# EAGLE board untitled (EAGLE 9.6.2)
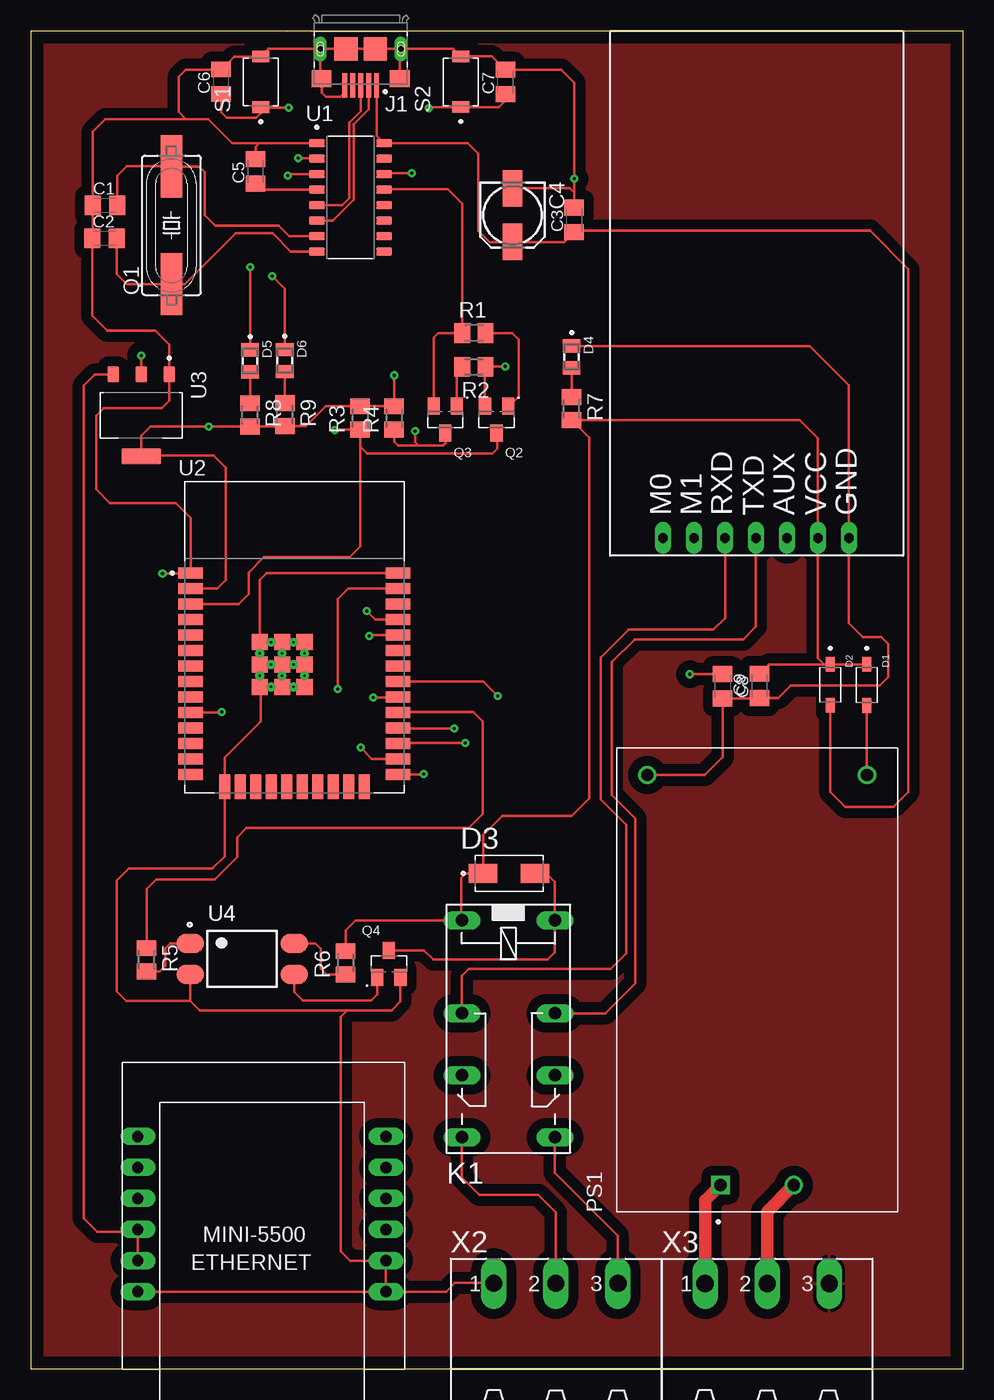
[diagram p0: board, top side]
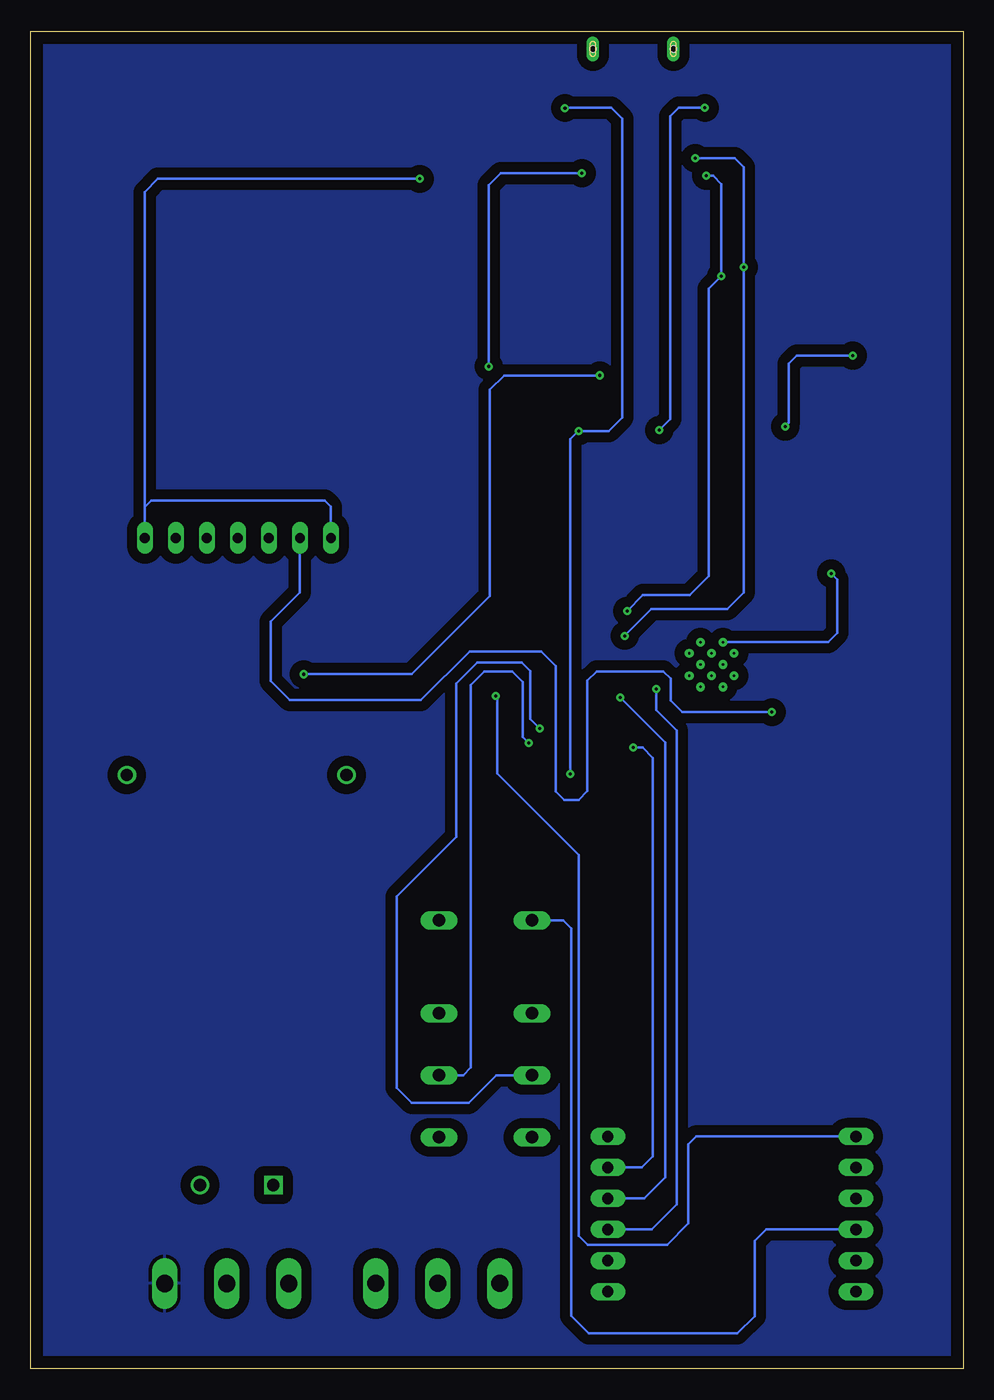
[diagram p1: board, bottom side, seen from below]

Size 76.4 x 109.6 mm. Coordinates in mm from the lower left corner, seen from the top.
Outline: 0,0 76.4,0 76.4,109.6 0,109.6 0,0
Copper layers (1*16): Top 0.035mm / dielectric 1.5mm / Bottom 0.035mm
Design rules "default *": minimum track width 6mil, minimum drill 0.25mm, track to track 6mil, track to pad 6mil, pad to pad 6mil, via to via 6mil, smd to smd 6mil, copper to edge 40mil, drill to drill 6mil, minimum pad ring 10mil, minimum via ring 8mil, stop-mask expansion 4mil, vias tented up to drill 0mil, thermal gap 10mil

## Footprints (pad centres in the part's own frame; a part is rotated, then mirrored left to right if it is on the bottom)
C0805K = smd 1.3 x 1.6: 1 -1,0; 2 1,0
153CLV-0505 = smd 3 x 1.6: + 2.2,0; - -2.2,0
SOD3715X145N = smd 1.21 x 0.73: A 1.68,0; C -1.68,0
DIOM5226X240N = smd 2.33 x 1.55: A 2.135,0; C -2.135,0
LEDC2012X120N = smd 1.1 x 1.45: A 0.9,0; C -0.9,0
EBYTEE220-900T22D = drill 0.8 pad 1.27 long: AUX -4.56,-10.98; GND -4.56,-16.06; M0 -4.56,-0.82; M1 -4.56,-3.36; RXD -4.56,-5.9; TXD -4.56,-8.44; VCC -4.56,-13.52
FCI_10118193-0001LF = smd 0.4 x 2: 1 -1.3,2.975; 2 -0.65,2.975; 3 0,2.975; 4 0.65,2.975; 5 1.3,2.975 | smd 1.6 x 1.4: S1 -3.2,2.45; S2 3.2,2.45 | smd 1.9 x 1.9: S3 1.2,0; S4 -1.2,0 | drill 0.5 pad 0.9 long: S5 -3.3,0; S6 3.3,0 | hole 0.5: -3.3,0; 3.3,0
351 = drill 1.016 long: 1 -3.81,-3.81; 16 -3.81,3.81; O1 8.89,-3.81; O2 8.89,3.81; P1 3.81,-3.81; P2 3.81,3.81; S1 13.97,-3.81; S2 13.97,3.81
CONV_HLK-5M05 = drill 1 pad 1.5 square: 1 -16.8,3 | drill 1 pad 1.5: 2 -16.8,-3; 3 16.8,9; 4 16.8,-9
SM49 = smd 5.08 x 1.778: 1 -4.826,0; 2 4.826,0
SOT95P240X120-3N = smd 1 x 1.4: 1 -0.95,-1.1; 2 0.95,-1.1; 3 0,1.1
M0805 = smd 1.3 x 1.6: 1 -0.95,0; 2 0.95,0
SW_TL1015AF160QG = smd 0.95 x 1.4: 1 -2.075,0; 2 2.075,0
SOIC127P600X180-16N = smd 1.31 x 0.62: 1 -2.75,4.445; 2 -2.75,3.175; 3 -2.75,1.905; 4 -2.75,0.635; 5 -2.75,-0.635; 6 -2.75,-1.905; 7 -2.75,-3.175; 8 -2.75,-4.445; 9 2.75,-4.445; 10 2.75,-3.175; 11 2.75,-1.905; 12 2.75,-0.635; 13 2.75,0.635; 14 2.75,1.905; 15 2.75,3.175; 16 2.75,4.445
MODULE_ESP32-WROOM-32D = smd 2 x 0.9: 1 -8.5,5.26; 2 -8.5,3.99; 3 -8.5,2.72; 4 -8.5,1.45; 5 -8.5,0.18; 6 -8.5,-1.09; 7 -8.5,-2.36; 8 -8.5,-3.63; 9 -8.5,-4.9; 10 -8.5,-6.17; 11 -8.5,-7.44; 12 -8.5,-8.71; 13 -8.5,-9.98; 14 -8.5,-11.25; 25 8.5,-11.25; 26 8.5,-9.98; 27 8.5,-8.71; 28 8.5,-7.44; 29 8.5,-6.17; 30 8.5,-4.9; 31 8.5,-3.63; 32 8.5,-2.36; 33 8.5,-1.09; 34 8.5,0.18; 35 8.5,1.45; 36 8.5,2.72; 37 8.5,3.99; 38 8.5,5.26 | smd 0.9 x 2: 15 -5.715,-12.25; 16 -4.445,-12.25; 17 -3.175,-12.25; 18 -1.905,-12.25; 19 -0.635,-12.25; 20 0.635,-12.25; 21 1.905,-12.25; 22 3.175,-12.25; 23 4.445,-12.25; 24 5.715,-12.25 | smd 1.33 x 1.33: 39_1 -2.835,-0.405; 39_2 -1,-0.405; 39_3 0.835,-0.405; 39_4 -2.835,-2.24; 39_5 -1,-2.24; 39_6 0.835,-2.24; 39_7 -2.835,-4.075; 39_8 -1,-4.075; 39_9 0.835,-4.075 | drill 0.2 pad 0.3: 39_10 -1.917,-0.405; 39_11 -0.083,-0.405; 39_12 -2.835,-1.323; 39_13 -1,-1.323; 39_14 0.835,-1.323; 39_15 -1.917,-2.24; 39_16 -0.083,-2.24; 39_17 -2.835,-3.158; 39_18 -1,-3.158; 39_19 0.835,-3.158; 39_20 -1.917,-4.075; 39_21 -0.083,-4.075
SOT229P700X180-4N = smd 1.31 x 0.93: 1 -3.345,2.29; 2 -3.345,0; 3 -3.345,-2.29 | smd 1.31 x 3.24: 4 3.345,0
SOT254P975X400-4N = smd 2.25 x 1.6: 1 -4.25,1.27; 2 -4.25,-1.27; 3 4.25,-1.27; 4 4.25,1.27
MINI_W5500 = drill 0.914 long: 3V3 21.844,-8.89; 3V3.2 21.844,-11.43; CS 1.524,-16.51; GND 1.524,-6.35; GND.2 1.524,-8.89; GND.3 21.844,-6.35; INT 1.524,-19.05; MISO 21.844,-19.05; MOSI 1.524,-11.43; NC 21.844,-13.97; RST 21.844,-16.51; SCLK 1.524,-13.97
MSTBA3 = drill 1.397 long: 1 -5.08,5.08; 2 0,5.08; 3 5.08,5.08

## Placement (x,y rotation side)
C1  [C0805K]  6.1,95.33 0 top
C2  [C0805K]  6.06,92.63 0 top
C3  [C0805K]  44.53,94.16 90 top
C4  [153CLV-0505]  39.48,94.53 270 top
C5  [C0805K]  18.43,98.13 90 top
C6  [C0805K]  15.6,105.47 90 top
C7  [C0805K]  38.89,105.44 90 top
C8  [C0805K]  59.7,55.97 90 top
C9  [C0805K]  56.7,55.95 270 top
D1  1N5819HW-7  [SOD3715X145N]  68.5,56.05 270 top
D2  1N5819HW-7  [SOD3715X145N]  65.51,56.06 270 top
D3  US1M-13  [DIOM5226X240N]  39.2,40.6 0 top
D4  SML-LXT0805IW-TR  [LEDC2012X120N]  44.32,82.92 270 top
D5  SML-LXT0805IW-TR  [LEDC2012X120N]  17.99,82.59 270 top
D6  SML-LXT0805IW-TR  [LEDC2012X120N]  20.82,82.62 270 top
EBYTEE220-900T22D1  [EBYTEE220-900T22D]  50.98,72.65 90 top
J1  10118193-0001LF  [FCI_10118193-0001LF]  27.04,108.16 180 top
K1  351  [351]  39.14,32.95 270 top
PS1  HLK-5M05  [CONV_HLK-5M05]  59.51,31.87 90 top
Q1  [SM49]  11.55,93.7 90 top
Q2  MMBT3904  [SOT95P240X120-3N]  38.17,77.79 180 top
Q3  MMBT3904  [SOT95P240X120-3N]  33.97,77.79 180 top
Q4  S9013  [SOT95P240X120-3N]  29.35,33.2 0 top
R1  [M0805]  36.32,84.87 0 top
R2  [M0805]  36.32,82.13 180 top
R3  [M0805]  27,77.93 90 top
R4  [M0805]  29.78,77.92 90 top
R5  [M0805]  9.51,33.53 270 top
R6  [M0805]  25.8,33.28 90 top
R7  [M0805]  44.33,78.69 270 top
R8  [M0805]  17.98,78.17 270 top
R9  [M0805]  20.84,78.2 270 top
S1  TL1015AF160QG  [SW_TL1015AF160QG]  18.86,105.46 90 top
S2  TL1015AF160QG  [SW_TL1015AF160QG]  35.24,105.47 90 top
U1  CH340G  [SOIC127P600X180-16N]  26.21,96 0 top
U2  ESP32-WROOM-32D  [MODULE_ESP32-WROOM-32D]  21.61,59.96 0 top
U3  AMS1117  [SOT229P700X180-4N]  9.07,78.14 270 top
U4  PC817X2NIP0F  [SOT254P975X400-4N]  17.34,33.61 0 top
U$1  MINI_W5500  [MINI_W5500]  30.64,-0.01 180 top
X2  MSTBA3  [MSTBA3]  43.04,1.93 0 top
X3  MSTBA3  [MSTBA3]  60.33,1.92 0 top

## Library data of the parts
C1-C9 = rcl; SPICEPREFIX: C
D1 D2 = 1N5819HW-7; AVAILABILITY: In Stock; DESCRIPTION: Diode Schottky 40 V 1A Surface Mount SOD-123; MF: Diodes Inc.; MP: 1N5819HW-7; PACKAGE: SOD-123 Fairchild Semiconductor; PRICE: None; PURCHASE-URL: https://pricing.snapeda.com/search/part/1N5819HW-7/?ref=eda
D3 = US1M-13; AVAILABILITY: In Stock; DESCRIPTION: Diode Standard 1000 V 1A Surface Mount SMA; MF: Diodes Incorporated; MP: US1M-13; PACKAGE: DO-214AC-214 Diodes Incorporated; PRICE: None; PURCHASE-URL: https://pricing.snapeda.com/search/part/US1M-13/?ref=eda
D4-D6 = SML-LXT0805IW-TR; AVAILABILITY: In Stock; DESCRIPTION: Red - LED Indication - Discrete 2V 0805 (2012 Metric); MF: Lumex Opto/Components; MP: SML-LXT0805IW-TR; PACKAGE: 0805 Lumex; PRICE: None; PURCHASE-URL: https://pricing.snapeda.com/search/part/SML-LXT0805IW-TR/?ref=eda
EBYTEE220-900T22D1 = EByte E220-900T22D
J1 = 10118193-0001LF; AVAILABILITY: In Stock; DESCRIPTION: USB - micro B USB 2.0 Receptacle Connector 5 Position Surface Mount, Right Angle; Through Hole; MF: FCI; MP: 10118193-0001LF; PACKAGE: None; PRICE: None; PURCHASE-URL: https://pricing.snapeda.com/search/part/10118193-0001LF/?ref=eda
K1 = relay; OC_FARNELL: unknown; OC_NEWARK: unknown
PS1 = HLK-5M05; AVAILABILITY: Not in stock; MF: Hi-link; MP: HLK-5M05; PACKAGE: Package; PRICE: None
Q1 = crystal; OC_FARNELL: unknown; OC_NEWARK: unknown
Q2 Q3 = MMBT3904; AVAILABILITY: In Stock; DESCRIPTION: Bipolar (BJT) Transistor NPN 40 V 200 mA 300MHz 300 mW Surface Mount SOT-23-3 (TO-236); MF: ON Semiconductor; MP: MMBT3904; PACKAGE: SOT-23-3 Motorola; PRICE: None
Q4 = S9013; AVAILABILITY: In Stock; DESCRIPTION: Bipolar (BJT) Transistor NPN 20V 500mA 625mW Through Hole TO-92-3; MF: JCET; MP: S9013; PACKAGE: SOT-23-3 JCET; PRICE: None; PURCHASE-URL: https://pricing.snapeda.com/search/part/S9013/?ref=eda
R1-R9 = rcl; SPICEPREFIX: R
S1 S2 = TL1015AF160QG; AVAILABILITY: In Stock; DESCRIPTION: Tactile Switch SPST-NO Top Actuated Surface Mount; MF: E-Switch; MP: TL1015AF160QG; PACKAGE: None; PRICE: None; PURCHASE-URL: https://pricing.snapeda.com/search/part/TL1015AF160QG/?ref=eda
U1 = CH340G; AVAILABILITY: Not in stock; DESCRIPTION: USB Interface Integrated Circuit; MF: WCH; MP: Ch340G; PACKAGE: None; PRICE: None
U2 = ESP32-WROOM-32D; AVAILABILITY: In Stock; DESCRIPTION: Bluetooth, WiFi 802.11b/g/n, Bluetooth v4.2 +EDR, Class 1, 2 and 3 Transceiver Module 2.4GHz ~ 2.5GHz Integrated; MF: Espressif Systems; MP: ESP32-WROOM-32D; PACKAGE: Module Espressif Systems; PRICE: None; PURCHASE-URL: https://pricing.snapeda.com/search/part/ESP32-WROOM-32D/?ref=eda
U3 = AMS1117; AVAILABILITY: Not in stock; DESCRIPTION: 1A LOW DROPOUT VOLTAGE REGULATOR SOT-223; MF: Advanced Monolithic Systems; MP: AMS1117; PACKAGE: SOT-223 Seeed Technology; PRICE: None
U4 = PC817X2NIP0F; AVAILABILITY: Not in stock; DESCRIPTION: Optoisolator Transistor Output 5000Vrms 1 Channel 4-SMD; MF: Sharp Microelectronics; MP: PC817X2NIP0F; PACKAGE: SMD-4 Sharp Microelectronics; PRICE: None
U$1 = ethernet-mikroavr
X2 X3 = con-phoenix-508; MF: FARNELL; MPN: 1757255; OC_FARNELL: 3705183; OC_NEWARK: 71C4162

## Nets
CONFIG_LORA: R5.1 U2.29
CS_LAN: U2.26 U$1.CS
DTR: Q3.2 R1.1 U1.13
EN: C6.1 Q2.3 R3.1 S1.1 U2.3
GND: C1.1 C2.1 C3.2 C4.- C5.2 C6.2 C7.2 C8.1 C9.2 D4.C EBYTEE220-900T22D1.GND EBYTEE220-900T22D1.M0 J1.5 J1.S1 J1.S2 J1.S3 J1.S4 J1.S5 J1.S6 PS1.3 Q4.2 S1.2 S2.2 U1.1 U2.1 U2.15 U2.38 U2.39_1 U2.39_2 U2.39_3 U2.39_4 U2.39_5 U2.39_6 U2.39_7 U2.39_8 U2.39_9 U2.39_10 U2.39_11 U2.39_12 U2.39_13 U2.39_14 U2.39_15 U2.39_16 U2.39_17 U2.39_18 U2.39_19 U2.39_20 U2.39_21 U3.1 U4.2 U$1.GND U$1.GND.2 U$1.GND.3 X2.1
IO0: C7.1 Q3.3 R4.1 S2.1 U2.25
M1: EBYTEE220-900T22D1.M1 U2.10
MISO_VSPI: U2.31 U$1.MISO
MOSI_VSPI: U2.37 U$1.MOSI
N: X3.3
N$1: D1.A PS1.4
N$2: C5.1 U1.4
N$3: Q2.1 R1.2
N$4: Q3.1 R2.2
N$5: R5.2 U4.1
N$6: D4.A R7.1
N$7: R6.1 U4.4
N$8: D3.A K1.16 Q4.3
N$9: C1.2 Q1.2 U1.7
N$10: C2.2 Q1.1 U1.8
N$11: D5.A R8.1
N$12: Q4.1 U4.3
N$13: PS1.1 X3.1
N$14: PS1.2 X3.2
N$15: D6.A R9.1
OUT+: C8.2 D1.C D2.C D3.C EBYTEE220-900T22D1.VCC K1.1 R6.2 R7.2 U3.3 U$1.3V3 U$1.3V3.2
RTS: Q2.2 R2.1 U1.14
RX: D6.C U1.3 U2.35
RX_LORA: EBYTEE220-900T22D1.RXD K1.P1
RXLORA_CONFIG: K1.S1 X2.2
RXLORA_MICRO: K1.O1 U2.28
SCK_VSPI: U2.30 U$1.SCLK
TX: D5.C U1.2 U2.34
TX_LORA: EBYTEE220-900T22D1.TXD K1.P2
TXLORA_CONFIG: K1.S2 X2.3
TXLORA_MICRO: K1.O2 U2.27
USB_N: J1.2 U1.6
USB_P: J1.3 U1.5
VCC: C9.1 R3.2 R4.2 R8.2 R9.2 U2.2 U3.2 U3.4
VUSB: C3.1 C4.+ D2.A J1.1 U1.16

## Tracks (layer width: path | path; a pad name or v marks a point on that pad's centre or on a via)
CONFIG_LORA
  Top 0.203: R5.1 9.51,39.33 10.31,40.13 15.08,40.13 16.92,41.96 16.92,43.56 17.68,44.32 35.89,44.32 37.04,45.47 37.04,53.04 36.26,53.82 30.14,53.82 U2.29
CS_LAN  (via drill 0.25)
  Top 0.203: v27.03,50.92 27.97,49.98 U2.26
  Bottom 0.203: U$1.CS 26.34,16.5 25.43,17.42 25.43,50.08 26.26,50.92 v27.03,50.92
DTR
  Top 0.203: Q3.2 33.02,84.51 33.4,84.89 35.35,84.89 R1.1 35.37,95.48 34.16,96.69 29.01,96.69 U1.13
EN  (via drill 0.25)
  Top 0.203: 27,75.76 R3.1 24.96,76.98 v24.9,76.92 | 27,75.76 27,75.56 27.57,74.99 37.8,74.99 38.24,75.43 38.24,76.62 Q2.3 | C6.1 15.6,102.97 16.06,102.51 18.48,102.51 18.88,102.91 18.88,103.37 | 18.88,103.37 S1.1 | U2.3 17.05,62.68 17.88,63.51 17.88,65.27 19.12,66.51 26.16,66.51 27.02,67.37 27.02,75.74 27,75.76 | v21.16,103.33 18.92,103.33 18.88,103.37
  Bottom 0.203: v24.9,76.92 24,77.82 24,102.64 23.29,103.34 21.18,103.34 v21.16,103.33
GND  (via drill 0.25)
  Top 0.203: J1.S6 23.74,105.81 J1.S2 23.84,104.57 24.18,104.23 25.37,104.23 25.77,104.64 25.77,105.15 J1.5 | J1.S6 J1.S3 J1.S4 J1.S5 | J1.S5 30.24,108.06 J1.S1 | J1.S5 34.63,108.16 S2.2 35.27,107.57 37.76,107.57 C7.2 43.48,106.45 44.53,105.39 v44.53,97.51 44.53,96.39 | C4.- 44.18,96.73 44.53,96.39 | C3.2 44.53,96.39 | U1.1 18.72,100.44 | C5.2 18.43,100.15 18.72,100.44 | 18.8,59.55 U2.39_10 U2.39_2 | 18.8,59.55 U2.39_1 18.78,64.65 19.35,65.22 U2.38 | U2.39_2 U2.39_11 U2.39_3 U2.39_14 U2.39_6 | U2.39_6 U2.39_19 U2.39_9 U2.39_21 U2.39_8 | U2.39_2 U2.39_13 U2.39_5 | U2.39_5 20.58,57.72 | 18.8,59.55 18.78,59.54 U2.39_12 U2.39_4 | U2.39_4 U2.39_15 20.58,57.72 | U2.39_5 U2.39_16 U2.39_6 | U2.39_4 U2.39_17 U2.39_7 18.86,55.88 | 20.58,57.72 20.58,56.83 U2.39_18 U2.39_8 | U2.39_8 U2.39_20 18.86,55.88 | U$1.GND 34.05,6.34 34.75,7.05 37.91,7.05 X2.1 | U$1.GND U$1.GND.2 26.18,8.88 25.41,9.66 25.41,28.85 25.96,29.39 | U$1.GND U$1.GND.3 | Q4.2 30.3,30.1 29.59,29.39 25.96,29.39 | 25.96,29.39 13.87,29.39 13.09,30.17 | U4.2 13.09,30.17 | PS1.3 55.24,48.67 56.7,50.13 C9.2 59.68,54.95 C8.1 61.26,54.97 62.28,55.99 69.56,55.99 70.26,56.68 70.26,59.4 69.66,59.99 68.16,59.99 67.04,61.11 EBYTEE220-900T22D1.GND 67.04,80.61 63.83,83.82 D4.C | J1.S6 19.48,108.16 S1.2 16.67,107.54 C6.2 12.72,106.47 12.14,105.9 12.14,103.01 12.73,102.42 | 12.73,102.42 6.14,102.42 5.1,101.38 C1.1 5.1,92.67 C2.1 5.06,86.3 6.27,85.09 10.2,85.09 11.36,83.93 U3.1 11.36,79.34 10.76,78.74 5.99,78.74 5.38,78.13 5.38,72.09 6.5,70.97 11.88,70.97 13.11,69.74 U2.1 12.9,65.01 12.57,65.01 12.41,65.17 v10.81,65.17 | 12.73,102.42 14.54,102.42 16.52,100.44 18.72,100.44
  Top 0.203: 18.86,55.88 18.86,53.06 15.9,50.09 U2.15 15.9,42 14.9,41.01 8.05,41.01 7.07,40.02 7.07,30.94 7.83,30.17 13.09,30.17
  Bottom 0.203: EBYTEE220-900T22D1.M0 51.8,70.66 52.29,71.16 66.5,71.16 67.04,70.62 EBYTEE220-900T22D1.GND 67.04,96.43 65.96,97.51 v44.53,97.51 44.52,97.51 | U2.39_10 11.08,59.55 10.34,60.29 10.34,64.7 v10.81,65.17
IO0  (via drill 0.25)
  Top 0.203: C7.1 38.89,103.92 38.36,103.39 S2.1 32.7,103.39 v32.62,103.32 | R4.1 29.78,75.98 30.13,75.64 31.78,75.64 | 31.78,75.64 33.77,75.64 34.01,75.88 34.01,76.65 Q3.3 | U2.25 32.18,48.71 v32.21,48.74 | v31.49,76.85 31.49,75.93 31.78,75.64
  Bottom 0.203: v32.21,48.74 32.21,76.18 31.54,76.85 v31.49,76.85 29.02,76.85 27.92,77.95 27.92,102.44 28.84,103.36 32.62,103.36 v32.62,103.32
M1  (via drill 0.25)
  Top 0.203: U2.10 15.65,53.79 v15.67,53.82
  Bottom 0.203: v15.67,53.82 23.03,53.82 23.98,54.76 23.98,56.56 24.58,57.16 30.03,57.16 30.78,56.4 30.78,47.35 31.51,46.63 32.67,46.63 33.37,47.32 33.37,57.6 34.57,58.8 40.42,58.8 44.42,54.8 55.15,54.8 56.73,56.38 56.73,61.23 54.34,63.63 EBYTEE220-900T22D1.M1
MISO_VSPI  (via drill 0.25)
  Top 0.203: v38.28,55.15 37.09,56.33 U2.31
  Bottom 0.203: U$1.MISO 21.88,19.04 22.51,18.41 22.51,11.92 24.27,10.17 30.74,10.17 31.51,10.93 31.51,42.11 38.19,48.79 38.19,55.06 v38.28,55.15
MOSI_VSPI  (via drill 0.25)
  Top 0.203: v25.15,55.71 25.15,63.08 26.02,63.95 U2.37
  Bottom 0.203: U$1.MOSI 25.52,11.42 23.47,13.47 23.47,52.3 25.15,53.99 v25.15,55.71
N
  pour Bottom (isolate 0.813): -0.58,110.21 76.42,110.21 76.42,-0.79 -0.58,-0.79
  pour Top (isolate 0.813): -0.58,110.21 76.42,110.21 76.42,-0.79 -0.58,-0.79
N$1
  Top 0.203: D1.A 68.5,48.69 PS1.4
N$2
  Top 0.203: U1.4 18.93,96.63 C5.1
N$3
  Top 0.203: Q2.1 39.2,78.89 39.98,79.67 39.98,84.36 39.46,84.87 R1.2
N$4
  Top 0.203: Q3.1 34.92,81.68 R2.2
N$5
  Top 0.203: R5.2 10.59,32.58 11.05,33.03 11.05,34.46 11.46,34.88 U4.1
N$6
  Top 0.203: R7.1 D4.A
N$7
  Top 0.203: R6.1 24.24,32.33 23.77,32.8 23.77,34.44 23.33,34.88 U4.4
N$8
  Top 0.203: D3.A 42.25,40.6 42.96,39.89 K1.16 42.96,34.14 42.36,33.55 32.98,33.55 32.22,34.3 Q4.3
N$9
  Top 0.203: C1.2 7.1,97.78 7.89,98.57 11.51,98.57 Q1.2 13.77,98.53 14.26,98.05 14.26,94.54 15.13,93.66 20.34,93.66 21.18,92.82 U1.7
N$10
  Top 0.203: C2.2 7.06,89.72 7.9,88.88 Q1.1 12.62,88.88 16.79,93.05 19.83,93.05 21.33,91.55 U1.8
N$11
  Top 0.203: D5.A R8.1
N$12
  Top 0.203: U4.3 21.59,30.91 22.3,30.19 27.91,30.19 28.4,30.69 Q4.1
N$13
  Top 1.016: X3.1 55.25,13.8 PS1.1
N$14
  Top 1.016: X3.2 60.33,12.88 PS1.2
N$15
  Top 0.203: D6.A 20.84,81.71 R9.1
OUT+
  Top 0.203: D2.C D1.C | C8.2 60.47,57.74 D2.C | R6.2 25.8,35.92 26.65,36.76 K1.1 35.29,36.81 35.29,40.24 35.65,40.6 D3.C 37.07,43.74 38.65,45.32 44.32,45.32 45.75,46.75 45.75,76.31 R7.2 63.02,77.74 64.5,76.26 EBYTEE220-900T22D1.VCC | U$1.3V3 U$1.3V3.2 8.6,11.23 5.45,11.23 4.35,12.33 4.35,80.56 5.27,81.48 U3.3 | D2.C 65.02,57.74 64.5,58.26 EBYTEE220-900T22D1.VCC | EBYTEE220-900T22D1.VCC
  Bottom 0.203: K1.1 32.77,36.76 32.11,36.1 32.11,4.36 30.66,2.91 18.5,2.91 17.09,4.32 17.09,10.49 16.16,11.42 U$1.3V3.2
RTS  (via drill 0.25)
  Top 0.203: Q2.2 37.22,82.08 R2.1 38.86,82.13 v38.88,82.15 | v31.23,97.99 29.05,97.99 U1.14
  Bottom 0.203: v38.88,82.15 38.88,96.99 37.88,97.99 v31.23,97.99
RX  (via drill 0.25)
  Top 0.203: D6.C 20.82,88.53 v19.81,89.54 | v21.05,97.77 21.18,97.9 U1.3 | v27.54,62.12 28.25,61.41 U2.35
  Bottom 0.203: v21.05,97.77 20.49,97.77 19.81,97.09 v19.81,89.54 20.84,88.52 20.84,64.97 22.39,63.42 26.24,63.42 v27.54,62.12
RX_LORA
  Top 0.203: K1.P1 35.34,32.2 35.91,32.77 47.51,32.77 48.78,34.05 48.78,44.59 46.72,46.65 46.72,58.28 49.01,60.57 55.91,60.57 56.88,61.54 EBYTEE220-900T22D1.RXD
RXLORA_CONFIG
  Top 0.203: X2.2 43.04,12.83 41.58,14.29 36.76,14.29 35.34,15.71 K1.S1
RXLORA_MICRO  (via drill 0.25)
  Top 0.203: v34.7,52.5 30.13,52.5 U2.28
  Bottom 0.203: K1.O1 38.25,24.06 40.5,21.81 45.17,21.81 46.39,23.03 46.39,38.72 41.51,43.6 41.51,56.18 39.8,57.89 36.15,57.89 35.46,57.2 35.46,53.26 v34.7,52.5
SCK_VSPI  (via drill 0.25)
  Top 0.203: v28.08,55.03 30.09,55.03 U2.30
  Bottom 0.203: U$1.SCLK 26.11,13.96 24.39,15.69 24.39,51.34 v28.08,55.03
TX  (via drill 0.25)
  Top 0.203: D5.C v17.99,90.28 17.97,90.3 | v21.95,99.2 23.42,99.2 U1.2 | v27.74,60.07 27.81,60.14 U2.34
  Bottom 0.203: v21.95,99.2 18.73,99.2 17.99,98.46 v17.99,90.28 17.99,63.61 19.31,62.28 25.55,62.28 27.74,60.09 v27.74,60.07
TX_LORA
  Top 0.203: K1.P2 47.08,29.14 49.52,31.58 49.52,45.12 47.61,47.02 47.61,57.92 49.47,59.78 58.37,59.78 59.42,60.83 EBYTEE220-900T22D1.TXD
TXLORA_CONFIG
  Top 0.203: X2.3 48.12,10.9 42.96,16.06 K1.S2
TXLORA_MICRO  (via drill 0.25)
  Top 0.203: v35.59,51.3 30.17,51.3 U2.27
  Bottom 0.203: K1.O2 40.98,24.06 40.33,24.71 40.33,56.05 39.23,57.15 36.93,57.15 36.07,56.3 36.07,51.78 v35.59,51.3
USB_N
  Top 0.203: J1.2 27.69,103.21 26.46,101.98 26.46,95.79 24.76,94.09 U1.6
USB_P
  Top 0.203: J1.3 27.04,103.07 26.1,102.13 26.1,95.94 25.52,95.36 U1.5
VCC  (via drill 0.25)
  Top 0.203: 13.06,63.9 U2.2 15.29,63.95 15.97,64.63 15.97,73.87 15,74.85 9.07,74.85 | U3.4 9.07,74.85 | 9.07,74.85 9.07,76.47 9.83,77.22 v14.59,77.22 R8.2 20.81,77.22 R9.2 22.54,77.25 24.17,78.88 R3.2 R4.2 v29.78,81.41 v29.79,81.41 | v54.01,56.92 56.67,56.92 C9.1 | U3.2 9.07,83.02 v9.06,83.04
  Bottom 0.203: v29.79,81.41 37.62,81.41 38.77,80.26 38.77,63.32 45.17,56.92 v54.01,56.92 | v9.06,83.04 13.64,83.04 14.29,82.38 14.29,77.53 v14.59,77.23 v14.59,77.22
VUSB
  Top 0.203: J1.1 28.34,101.06 U1.16 35.83,100.44 36.69,99.58 36.69,93.27 37.62,92.33 C4.+ 43.71,92.33 C3.1 44.62,93.25 68.76,93.25 71.91,90.1 71.91,47.29 70.65,46.03 66.74,46.03 65.51,47.26 D2.A